# Altium PCB Ad_Fpga.PcbDoc (part 5 of 8)
Units mil, origin at the board's own origin, x right, y up, seen from the top; angles counter-clockwise.
Board outline 5995 x 3921.26 mil, 6 copper layers (Top Layer, GND, Mid-Layer 1, Mid-Layer 2, VCC, Bottom Layer); 476 components, 538 nets, 2139 pads, 1047 vias.
Unrouted connection lines stored in the file: 2.
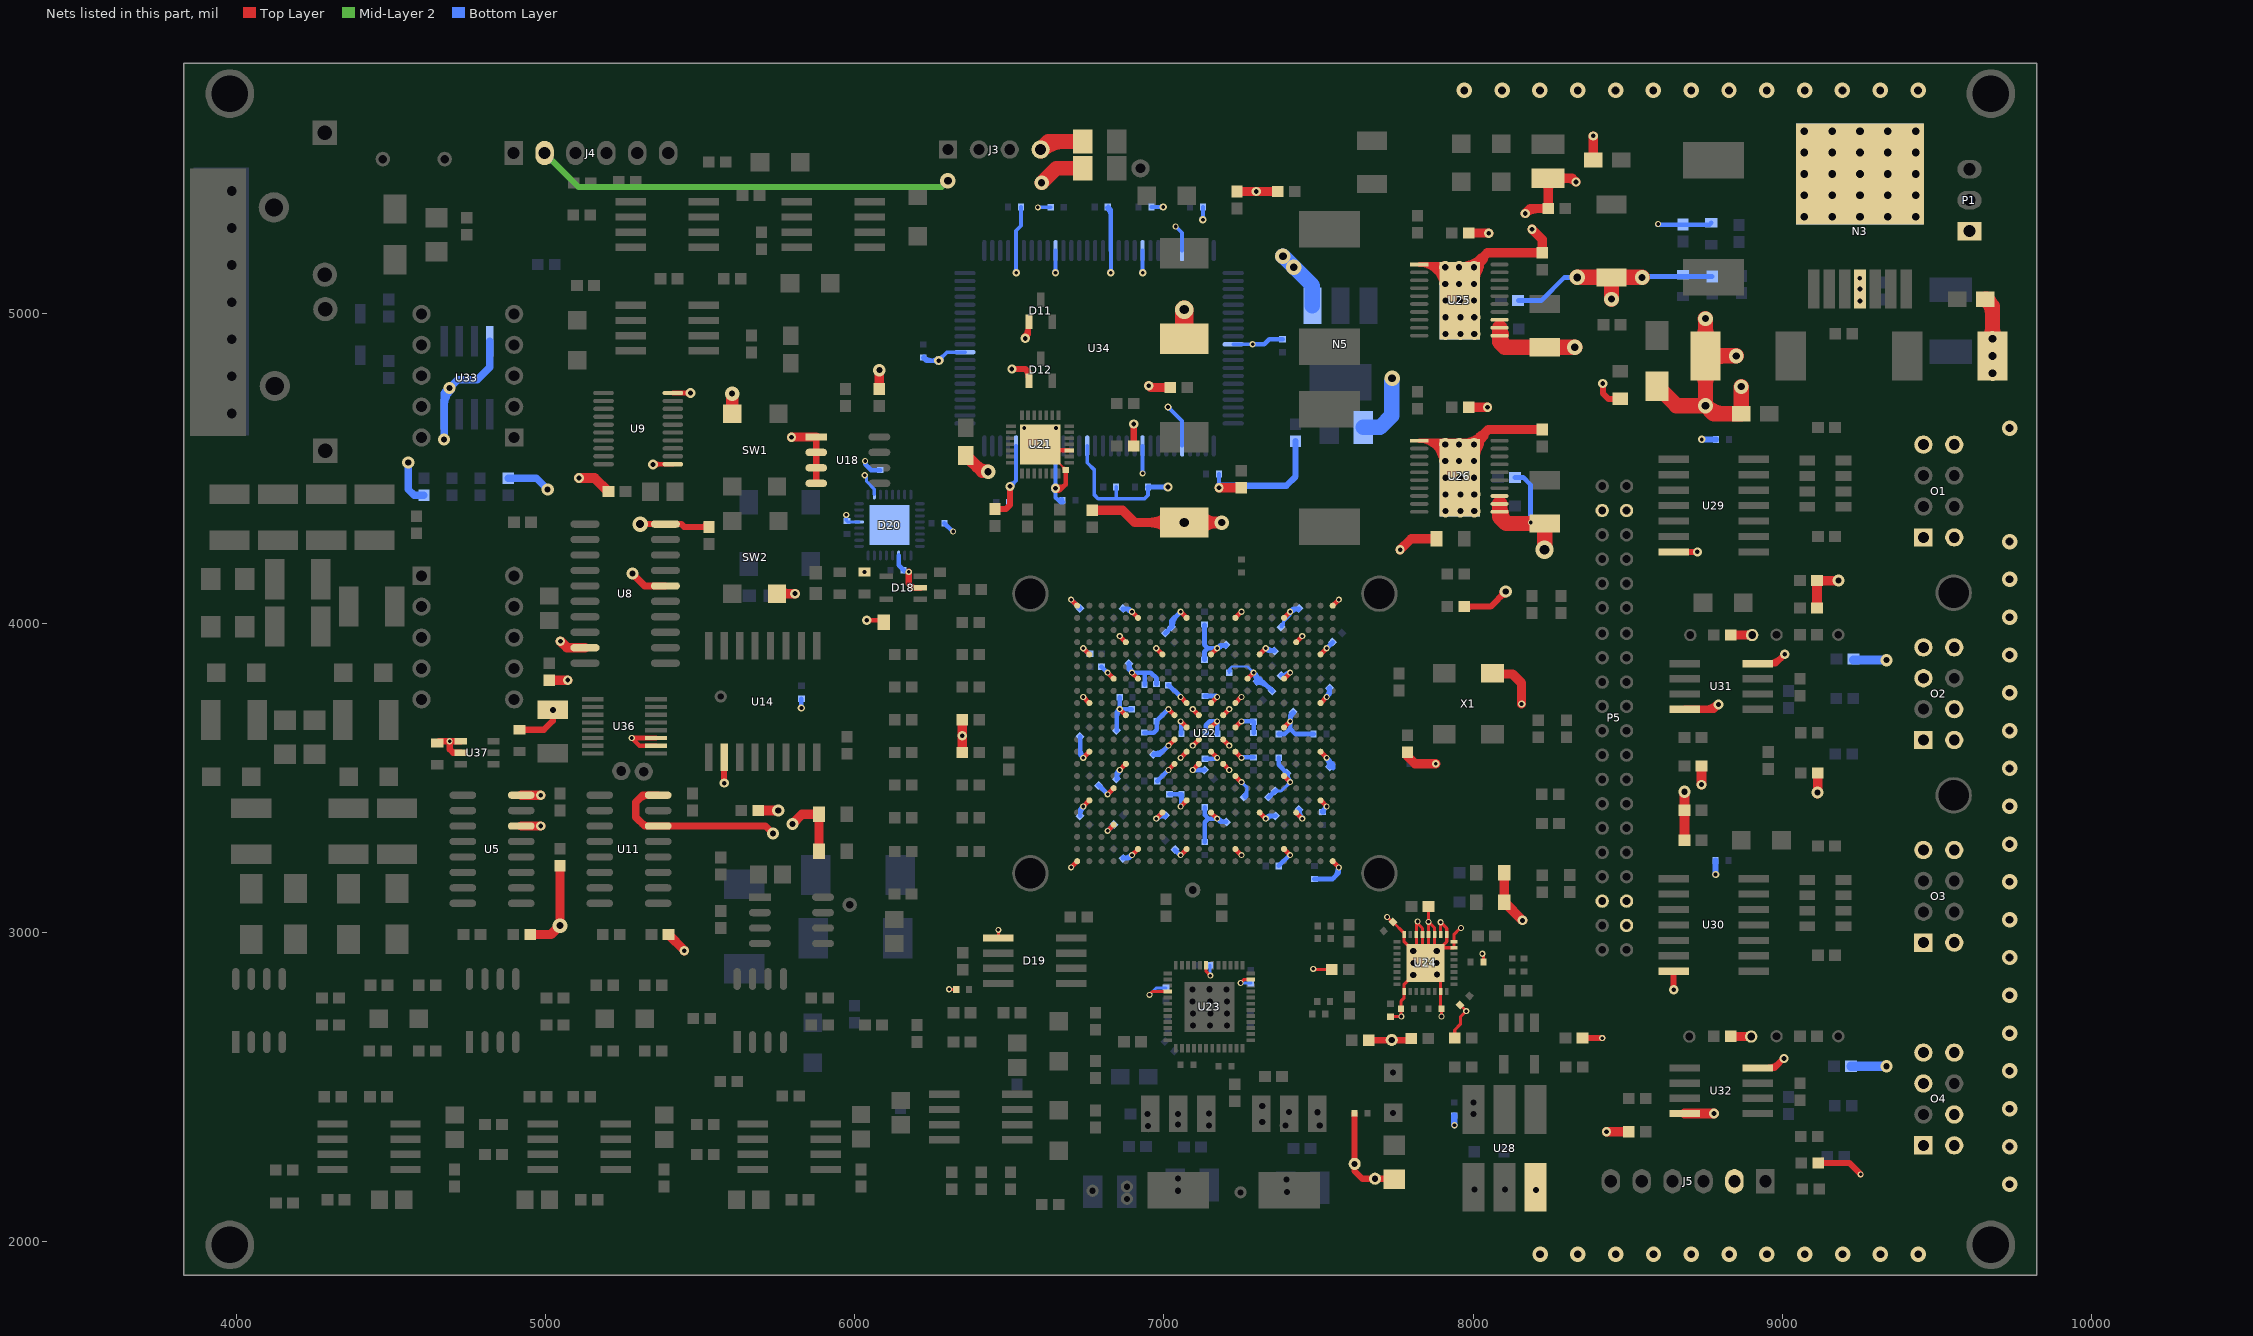
[diagram p9: the nets of this part, all layers, seen from the top]

## Via types
v1: diameter 19.68, hole 11.81, Top Layer to Bottom Layer, 523 vias
v2: diameter 50, hole 25, Top Layer to Bottom Layer, 162 vias
v3: diameter 30, hole 15, Top Layer to Bottom Layer, 100 vias
v4: diameter 39.37, hole 19.68, Top Layer to Bottom Layer, 75 vias
v5: diameter 31.5, hole 15.75, Top Layer to Bottom Layer, 44 vias
v6: diameter 40, hole 20, Top Layer to Bottom Layer, 38 vias
v7: diameter 24, hole 12, Top Layer to Bottom Layer, 33 vias
v8: diameter 47.24, hole 23.62, Top Layer to Bottom Layer, 24 vias
v9: diameter 59.06, hole 31.5, Top Layer to Bottom Layer, 10 vias
v10: diameter 60, hole 30, Top Layer to Bottom Layer, 9 vias
v11: diameter 25.98, hole 12.99, Top Layer to Bottom Layer, tented top, 9 vias
v12: diameter 23.62, hole 11.81, Top Layer to Bottom Layer, 8 vias
v13: diameter 50, hole 27.56, Top Layer to Bottom Layer, 4 vias
v14: diameter 51.18, hole 27.56, Top Layer to Bottom Layer, 2 vias
v15: diameter 39.37, hole 23.62, Top Layer to Bottom Layer, 2 vias
v16: diameter 80, hole 40, Top Layer to Bottom Layer, 1 vias
v17: diameter 47.24, hole 19.68, Top Layer to Bottom Layer, 1 vias
v18: diameter 47.24, hole 27.56, Top Layer to Bottom Layer, 1 vias
v19: diameter 22.05, hole 11.81, Top Layer to Bottom Layer, 1 vias

## Nets (pads, with @x,y where several pads share a name; then routed paths per layer and width w, separated by ;. In a path a pad name is that pad's centre, name@x,y a point inside that pad or via, vN(x,y) a via of type N, cw(c..) or ccw(c..) an arc to the next point about the centre after c; other vN are vias at no path point) (continued)
GND: C18.1 C20.2 C22.2 C23.2 C28.1 C35.2 C41.1 C43.2 C46.2 C49.2 C54.2 C56.2 C57.2 C58.2 C59.1 C65.1 C69.2 C74.2 C75.2 C77.2 C78.2 C79.2 C80.2 C81.2 C82.2 C83.2 C84.2 C85.2 C86.2 C87.2 C88.2 C89.2 C90.1 C91.2 C92.2 C93.2 C96.2 C97.1 C99.2 C104.2 C105.2 C106.2 C110.1 C113.1 C114.1 C115.1 C117.1 C118.1 C119.1 C120.1 C121.1 C122.1 C123.1 C124.1 C125.1 C126.1 C127.1 C128.1 C129.1 C130.1 C131.1 C132.1 C133.1 C134.1 C135.1 C136.1 C138.1 C139.1 C140.1 C141.1 C142.1 C143.1 C144.1 C145.1 C146.1 C147.1 C148.1 C152.1 C153.1 C154.1 C155.1 C156.1 C158.2 C159.1 C160.1 C161.1 C162.1 C163.2 C164.1 C165.1 C166.1 C167.1 C168.1 C169.1 C170.1 C171.1 C172.1 C173.1 C174.1 C175.1 C176.1 C177.1 C178.1 C179.1 C180.1 C181.1 C182.1 C183.1 C184.1 C185.1 C186.1 C187.1 C188.1 C189.1 C190.1 C191.1 C192.1 C193.1 C194.1 C195.1 C196.1 C197.1 C198.1 C199.1 C200.1 C201.1 C204.1 C205.1 C206.1 C207.1 C208.1 C209.1 C210.1 C211.1 C215.2 C216.1 C218.1 C219.1 C220.2 C221.2 C222.2 C223.1 C224.1 C225.1 C226.1 C227.1 C228.2 C229.2 D6.1 D8.2 D9.2 D10.2 D11.1 D12.1 D13.2 D14.2 D15.2 D16.2 D18.2 D19.1 D20.11 D20.21 D20.26 D20.33 J3.4 J4.2 J5.2 N3.4 N3.8 N5.1 O1.1 O1.4 O1.5 O1.8 O2.1 O2.3 O2.4 O2.5 O2.7 O2.8 O3.1 O3.4 O3.5 O3.8 O4.1 O4.3 O4.4 O4.5 O4.7 O4.8 P1.1 P5.4 P5.5 P5.6 P5.37 P5.38 pad.0@5023,3719 pad.0@7617,2250 pad.0@7683,2202 pad.0@7737,2651 pad.0@7806.5,2860.5 pad.0@7806.64,2939.36 pad.0@7807,2900 pad.0@7882,2900 pad.0@7882.64,2939 pad.0@7883.25,2862.75 pad.0@7957,4470 pad.0@7957,5043 pad.0@8204,2166 pad.0@8903,3961 pad.0@9251.02,5452.84 pad.2 R61.1 R65.2 R69.1 R77.2 R78.1 R80.2 R87.1 R89.2 R90.2 R93.2 R95.1 R101.1 R104.1 R119.2 R126.2 R129.2 R141.1 R142.1 R153.1 R154.1 SW1.2 SW2.1 U5.6 U5.8 U8.6 U8.10 U8.19 U9.1 U9.10 U11.6 U11.8 U14.10 U18.1 U18.2 U18.3 U18.4 U21.0 U21.3 U22.A1 U22.A22 U22.AA5 U22.AA9 U22.AA13 U22.AA17 U22.AB1 U22.AB22 U22.B5 U22.B9 U22.B13 U22.B17 U22.D4 U22.D18 U22.E2 U22.E7 U22.E11 U22.E15 U22.E21 U22.G5 U22.G18 U22.H7 U22.J2 U22.J9 U22.J11 U22.J13 U22.J15 U22.J21 U22.K10 U22.K12 U22.K14 U22.L5 U22.L9 U22.L11 U22.L13 U22.L18 U22.M10 U22.M12 U22.M14 U22.N2 U22.N9 U22.N11 U22.N13 U22.N17 U22.N21 U22.P10 U22.P12 U22.P14 U22.R5 U22.R18 U22.U2 U22.U7 U22.U21 U22.V4 U22.V10 U22.V14 U22.W7 U22.W16 U22.W19 U23.7 U23.16 U23.47 U24.7 U24.8 U24.9 U24.10 U24.11 U24.12 U24.13 U24.14 U24.16 U24.25 U24.31 U24.33 U25.1 U25.11 U25.12 U25.13 U26.1 U26.11 U26.12 U26.13 U28.3 U29.7 U30.7 U31.4 U31.8 U32.4 U32.8 U33.4 U33.8 U34.5 U34.10 U34.17 U34.21 U34.26 U34.40 U34.55 U34.60 U34.67 U34.71 U34.76 U34.90 U36.10 U36.11 U37.1 U37.2 X1.2 | length 43663
  Top Layer w7: U21.0@6619.2,4558.37 U21.0@6682.19,4495.38 ; U21.0@6675.85,4495.38 ccw(c6660.53,4495.38) 6671.36,4506.21 ccw(c6682.19,4517.03) U21.0@6682.19,4501.72
  Top Layer w10: v1(6305,2815) 6306,2815 6307.02,2813.98 C216.1@6327.7,2813.98 ; v1(6464,3007) 6464.4,3006.6 D19.1@6464.4,2981.12 ; v1(6953,2797) 6953,2798 6962.5,2807.5 U23.16@7012.11,2807.5 ; U23.7@7136.61,2892.6 7136.61,2872.39 v1(7150,2859) ; v1(7248,2835) 7259.9,2846.9 U23.47@7280.71,2846.9 ; v1(7483,2881) 7483,2878 7484,2879 R89.2@7543,2879 ; v1(7722,3049) 7738.4,3032.6 C206.1@7740.85,3032.6 7777.24,2996.2 U24.16@7777.24,2991.84 7777.24,2968.76 U24.33@7846,2900 ; C200.1@7733.14,2726.22 7766.22,2726.22 v1@7767,2727 ; v1(7768,2727) v1@7767,2727 ; U24.33@7816.64,2929.36 U24.14@7816.64,2991.84 v1@7816.64,3031.64 ; v1(7821,3034) 7819,3034 v1@7816.64,3031.64 ; R87.1@7856,3083 v1(7856,3033) v1@7855.94,3032.94 ; U24.10@7895.34,2991.84 v1(7895.34,3031.66) 7915.04,3011.96 U24.9@7915.04,2991.84 7915.04,2969.04 U24.33@7895.34,2949.34 ; v1(7898,2727) 7897.7,2727.3 C208.1@7897.7,2752.02 7895.34,2754.37 U24.31@7895.34,2808.44 7895.34,2850.66 U24.33@7846,2900 ; R101.1@7941,2657 7941,2683.37 7959,2701.37 7959,2725.43 v1@7978,2744.43 ; C205.1@7958.22,2764.2 v1@7978,2744.43 ; v1(7961,3013) 7959,3013 7937.84,2991.84 U24.8@7937.84,2969.04 U24.7@7937.84,2949.34 U24.33@7895.34,2949.34 ; v1(7978,2744) v1@7978,2744.43 ; v1(8030,2930) 8033.7,2926.3 C198.1@8033.7,2903.02 ; v1@7767,2727 7767.3,2727.3 C199.1@7767.3,2751.98 7767.3,2777.3 7777.24,2787.24 U24.25@7777.24,2808.44 7777.24,2831.24 U24.33@7846,2900 ; v1@7816.64,3031.64 7836.34,3011.94 U24.13@7836.34,2991.84 7836.34,2909.66 U24.33@7846,2900 ; U24.33@7846,2900 7855.94,2909.94 U24.12@7855.94,2991.84 v1@7855.94,3032.94 ; U24.33@7846,2900 7875.64,2929.64 U24.11@7875.64,2991.84 7875.64,3013.24 v1@7855.94,3032.94 ; U24.33@7846,2900 U24.33@7895.34,2949.34
  Top Layer w11.81: v5@6544.04,4927.96 ccw(c6496.94,4975.13) D11.1@6563.6,4975.13 6563.6,4933.6 ; v5@6551,4920 v5(6551,4921) 6563.6,4933.6 ; v5@6552.39,4919.61 ccw(c6525.39,4946.64) 6563.6,4946.64 ; v5@6553.19,4930.6 ccw(c6555.68,4941.52) 6563.6,4933.6 ; 6555.05,4943.22 cw(c6578.9,4936.83) D11.1@6566.55,4958.21 ; D11.1@6559.42,4959.15 cw(c6549.34,4949.07) 6563.6,4949.07 cw(c6577.86,4949.07) D11.1@6567.77,4959.15 ; v5@6560.6,4923.19 cw(c6571.52,4925.68) 6563.6,4933.6
  Top Layer w15: U36.10@5356.72,3603 5303,3603 v1(5278,3628) U36.11@5356.72,3628 ; v3(6038,4009) 6086,4009 D10.2@6093,4002 ; U21.0@6599.51,4578.06 6619.2,4558.37 U21.3@6694,4558.37 ; v3(6649,4436) 6670,4436 6682.19,4448.19 ; U21.0@6682.19,4495.38 6682.19,4448.19 ; v1(6699.54,3209.54) U22.AB22@6719.23,3229.23 ; v1(6699.54,4075.69) U22.AB1@6719.23,4056 ; v1(6738.91,3406.39) U22.AA17@6758.6,3426.08 ; v1(6738.91,3563.87) U22.AA13@6758.6,3583.56 ; v1(6738.91,3760.73) U22.AA9@6758.6,3741.04 ; v1(6738.91,3918.21) U22.AA5@6758.6,3898.52 ; v1(6817.65,3327.65) U22.W19@6837.34,3347.34 ; v1(6817.65,3445.76) U22.W16@6837.34,3465.45 ; v1(6817.65,3839.47) U22.W7@6837.34,3819.78 ; v1(6857.02,3524.5) U22.V14@6876.71,3544.19 ; v1(6857.02,3721.36) U22.V10@6876.71,3701.67 ; v1(6857.02,3957.58) U22.V4@6876.71,3937.89 ; v1(6896.39,3248.91) U22.U21@6916.08,3268.6 ; v1(6896.39,3839.47) U22.U7@6916.08,3819.78 ; v1(6896.39,4036.32) U22.U2@6916.08,4016.63 ; v1(6975.13,3367.02) U22.R18@6994.82,3386.71 ; v1(6975.13,3918.21) U22.R5@6994.82,3898.52 ; v1(7014.5,3524.5) U22.P14@7034.19,3544.19 ; v1(7014.5,3603.24) U22.P12@7034.19,3622.93 ; v1(7014.5,3721.36) U22.P10@7034.19,3701.67 ; v1(7053.87,3248.91) U22.N21@7073.56,3268.6 ; v1(7053.87,3406.39) U22.N17@7073.56,3426.08 ; v1(7053.87,3563.87) U22.N13@7073.56,3583.56 ; v1(7053.87,3681.99) U22.N11@7073.56,3662.3 ; v1(7053.87,3760.73) U22.N9@7073.56,3741.04 ; v1(7053.87,4036.32) U22.N2@7073.56,4016.63 ; v1(7093.24,3524.5) U22.M14@7112.93,3544.19 ; v1(7093.24,3603.24) U22.M12@7112.93,3622.93 ; v1(7093.24,3721.36) U22.M10@7112.93,3701.67 ; U22.L18@7152.3,3386.71 v1(7171.99,3367.02) ; U22.L13@7152.3,3583.56 v1(7171.99,3563.87) ; U22.L11@7152.3,3662.3 v1(7171.99,3681.99) ; U22.L9@7152.3,3741.04 v1(7171.99,3760.73) ; U22.L5@7152.3,3898.52 v1(7171.99,3918.21) ; U22.K14@7191.67,3544.19 v1(7211.36,3524.5) ; U22.K12@7191.67,3622.93 v1(7211.36,3603.24) ; U22.K10@7191.67,3701.67 v1(7211.36,3721.36) ; U22.J21@7231.04,3268.6 v1(7250.73,3248.91) ; U22.J15@7231.04,3504.82 v1(7250.73,3485.13) ; U22.J13@7231.04,3583.56 v1(7250.73,3563.87) ; U22.J11@7231.04,3662.3 v1(7250.73,3681.99) ; U22.J9@7231.04,3741.04 v1(7250.73,3760.73) ; U22.J2@7231.04,4016.63 v1(7250.73,4036.32) ; U22.H7@7270.41,3819.78 v1(7290.1,3839.47) ; U22.G18@7309.78,3386.71 v1(7329.47,3367.02) ; U22.G5@7309.78,3898.52 v1(7329.47,3918.21) ; U22.E21@7388.52,3268.6 v1(7408.21,3248.91) ; U22.E15@7388.52,3504.82 v1(7408.21,3485.13) ; U22.E11@7388.52,3662.3 v1(7408.21,3681.99) ; U22.E7@7388.52,3819.78 v1(7408.21,3839.47) ; U22.E2@7388.52,4016.63 v1(7408.21,4036.32) ; U22.D18@7427.89,3386.71 v1(7447.58,3367.02) ; U22.D4@7427.89,3937.89 v1(7447.58,3957.58) ; U22.B17@7506.63,3426.08 v1(7526.32,3406.39) ; U22.B13@7506.63,3583.56 v1(7526.32,3563.87) ; U22.B9@7506.63,3741.04 v1(7526.32,3760.73) ; U22.B5@7506.63,3898.52 v1(7526.32,3918.21) ; U22.A1@7546,4056 v1(7565.69,4075.69) ; U22.A22@7547.77,3229.23 U22.A22@7546,3229.23 7566,3209.23 v1(7566,3209) ; 7858.09,5160 cw(c7858.09,5099.09) pad.0@7901.16,5142.16 ; 7861.65,5153.34 ccw(c7876.69,5185.27) pad.0@7901.29,5159.96 ; 7865.45,4590.16 ccw(c7885.13,4608.88) pad.0@7902.16,4587.73 ; 7869.83,5156.58 ccw(c7881.92,5190.15) pad.0@7902.71,5161.16 ; 7875.3,4584.09 ccw(c7886.34,4603.2) pad.0@7901.44,4587.11 ; 7876.68,4578.36 ccw(c7895.38,4596.15) pad.0@7911.57,4576.05 ; 7879.92,4585.9 cw(c7872.3,4555.35) pad.0@7899.28,4571.56 ; 7880.77,5159.1 cw(c7872.72,5129.8) pad.0@7899.13,5144.82 ; 7881.06,5159.02 ccw(c7889,5187.91) pad.0@7903.82,5161.87 ; 7881.24,5144.11 ccw(c7892.81,5168.68) pad.0@7911.74,5149.21 ; 7881.71,4585.45 ccw(c7888.7,4613.47) pad.0@7903.56,4588.72 ; 7886.34,4559.24 cw(c7851.48,4528.88) pad.0@7897.54,4525.04 ; 7887.91,4566.56 ccw(c7905.63,4583.42) pad.0@7920.98,4564.37 ; 7889.32,4571.07 ccw(c7946.72,4585.6) pad.0@7916.4,4534.74 ; 7890.61,4565.97 ccw(c7959.36,4583.36) pad.0@7956.23,4512.52 ; 7890.8,4546.44 ccw(c7910.05,4560.12) pad.0@7910.02,4536.5 ; v6@7891.92,5147.5 cw(c7869.19,5108.13) pad.0@7914.57,5105.48 ; pad.0@7894.07,4541.84 cw(c7876.86,4529.6) pad.0@7897.67,4526.08 ; pad.0@7896.55,4572.74 ccw(c7954.28,4578.94) pad.0@7917.84,4533.73 ; pad.0@7896.82,5144.67 ccw(c7921.14,5186.79) pad.0@7940.28,5142.07 ; pad.0@7899.6,5106.35 ccw(c7842.03,5109.72) 7870.86,5159.65 ccw(c7906.41,5221.22) pad.0@7934.38,5155.86 ; pad.0@7899.72,5104.11 ccw(c7879.44,5118.15) pad.0@7902.19,5127.66 ; pad.0@7900.59,5114.15 ccw(c7854.66,5123.23) 7887.98,5156.12 ccw(c7909.95,5177.81) pad.0@7926.39,5151.67 ; pad.0@7900.64,4541.41 ccw(c7856.6,4550.32) 7887.82,4582.64 ccw(c7909.63,4605.22) pad.0@7926.36,4578.65 ; pad.0@7901.04,5126.38 cw(c7920.02,5135.42) pad.0@7908.65,5153.1 ; pad.0@7901.1,5142.83 ccw(c7920.14,5161.62) pad.0@7934.37,5138.98 ; pad.0@7901.57,4569.35 ccw(c7920.12,4588.55) pad.0@7934.35,4565.96 ; pad.0@7902.98,4534.34 ccw(c7895.31,4545.62) 7908.85,4547.23 ccw(c7926.37,4549.31) pad.0@7916.79,4534.5 ; pad.0@7903.09,5160 cw(c7903.09,5099.09) pad.0@7946.16,5142.16 ; pad.0@7905.29,4535.58 ccw(c7901.92,4543.86) pad.0@7910.59,4546.05 ; pad.0@7907.5,5138.75 cw(c7900.47,5104.25) pad.0@7929.84,5123.67 ; pad.0@7908.1,4565.65 cw(c7898.59,4503.95) pad.0@7948.95,4540.83 ; pad.0@7908.16,5154.11 ccw(c7922.58,5187.17) pad.0@7946.66,5160.31 ; pad.0@7908.36,5111 cw(c7929.3,5120.98) pad.0@7916.76,5140.49 ; pad.0@7908.41,5138.6 cw(c7901.22,5082.57) pad.0@7945.93,5117.1 ; pad.0@7909.12,4566.32 ccw(c7903.6,4619.77) pad.0@7945.3,4585.88 ; pad.0@7909.27,4543.69 cw(c7927.58,4551) pad.0@7916.82,4567.53 ; pad.0@7911.84,4579.69 cw(c7885.9,4555.92) pad.0@7921.05,4554.38 ; pad.0@7913.41,4561.15 ccw(c7900.81,4609.95) pad.0@7944.23,4584.35 ; pad.0@7916.19,4570.34 ccw(c7911.95,4613.32) pad.0@7945.34,4585.93 ; pad.0@7916.49,5140.32 cw(c7921.81,5131.57) pad.0@7929.92,5137.83 ; pad.0@7917.2,4513.78 cw(c7932.38,4492.21) pad.0@7936.9,4518.2 ; pad.0@7917.28,4588.16 ccw(c7932.21,4609.02) 7937.29,4583.88 ccw(c7942.11,4560.11) pad.0@7920.92,4571.91 ; pad.0@7918.56,4587.11 ccw(c7933.66,4603.2) pad.0@7944.7,4584.09 ; pad.0@7918.79,5157.5 ccw(c7929.65,5187.8) pad.0@7947.91,5161.29 ; pad.0@7918.84,5142.16 cw(c7961.91,5099.09) pad.0@7961.91,5160 ; pad.0@7920.22,4531.2 ccw(c7948,4550.75) pad.0@7942.19,4517.28 ; pad.0@7920.3,4584.09 ccw(c7931.34,4603.2) pad.0@7946.44,4587.11 ; pad.0@7922.02,5147.56 ccw(c7976.73,5131.92) pad.0@7926.98,5104.3 ; pad.0@7922.16,4562.36 cw(c7887.83,4519.64) pad.0@7942.53,4523.19 ; pad.0@7922.25,5148.5 ccw(c7946.89,5143.48) pad.0@7925.91,5129.61 ; pad.0@7925.72,4564.32 ccw(c7919.69,4587.66) pad.0@7942.94,4581.3 ; pad.0@7928.69,5139.42 ccw(c7981.46,5161.48) pad.0@7959.75,5108.56 ; pad.0@7929.56,5144.77 ccw(c7939.72,5168.05) pad.0@7956.67,5149.14 ; pad.0@7930.42,4583.09 cw(c7931.63,4571.36) pad.0@7942.98,4574.58 ; pad.0@7931.33,4564.9 ccw(c7922.69,4558.57) pad.0@7916.84,4567.53 ; pad.0@7934.49,4572.15 cw(c7936.18,4555.06) pad.0@7947.07,4568.34 ; pad.0@7934.72,4555.79 cw(c7918.58,4535.71) pad.0@7943.1,4527.83 ; pad.0@7935.37,4510.85 ccw(c7932.19,4542.67) pad.0@7956.93,4522.42 ; pad.0@7945.39,5104.99 ccw(c7927.67,5119.71) pad.0@7948.92,5128.59 ; pad.0@7946.72,5130.34 cw(c7962.74,5137.9) pad.0@7953.73,5153.15 ; pad.0@7951.09,5160 cw(c7951.09,5099.09) pad.0@7994.16,5142.16 ; pad.0@7953.75,5115.46 cw(c7971.14,5123.68) pad.0@7961.36,5140.24 ; pad.0@7956.84,4579.69 cw(c7930.91,4555.91) pad.0@7966.06,4554.39 ; pad.0@7963.69,4586.98 ccw(c7978.13,4601.91) pad.0@7988.76,4584.07 ; pad.0@7963.84,5142.16 cw(c8006.91,5099.09) pad.0@8006.91,5160 ; pad.0@7967.02,5147.58 ccw(c8013.56,5134.35) pad.0@7971.3,5110.8 ; pad.0@7968.3,4584.09 ccw(c7979.34,4603.2) pad.0@7994.44,4587.11 ; pad.0@7980.95,4557.2 cw(c7962.7,4534.49) pad.0@7990.9,4527.15 ; pad.0@8008,5160 U25.1@7826,5160 ; 6667.11,4436 cw(c6667.11,4454.11) 6654.3,4441.3 ccw(c6667.11,4454.11) 6667.11,4436 ; 6667.11,4436 ccw(c6667.11,4417.89) 6654.3,4430.7 cw(c6667.11,4417.89) 6667.11,4436 ; 6682.19,4448.19 cw(c6663.3,4467.07) 6652.14,4442.81 ccw(c6663.3,4467.07) 6682.19,4448.19 ; U26.1@7826,4590 cw(c7826,4515.73) pad.0@7899.84,4523.77 ; U26.1@7826,4590 cw(c7826,4515.73) pad.0@7899.84,4523.77 ; U26.1@7826,4590 cw(c7826,4515.73) pad.0@7899.84,4523.77 ; U26.1@7826,4590 pad.0@8013,4590 ; U25.1@7826,5160 cw(c7826,5085.32) 7900.02,5095.31 ccw(c7826,5085.32) U25.1@7826,5160 ; U26.1@7842.73,4590 cw(c7842.73,4517.55) pad.0@7914.75,4525.4 ; U26.1@7842.73,4590 cw(c7842.73,4517.55) pad.0@7914.75,4525.4 ; U26.1@7842.73,4590 cw(c7842.73,4517.55) pad.0@7914.75,4525.4 ; 7859.47,4584.09 ccw(c7877.79,4621.27) pad.0@7902.54,4588.03 ; 7859.47,4584.09 ccw(c7877.79,4621.27) pad.0@7902.54,4588.03 ; 7859.47,4584.09 ccw(c7877.79,4621.27) pad.0@7902.54,4588.03 ; 7859.45,4590 cw(c7859.45,4519.37) pad.0@7929.66,4527.02 ; 7859.45,4590 cw(c7859.45,4519.37) pad.0@7929.66,4527.02 ; 7859.45,4590 cw(c7859.45,4519.37) pad.0@7929.66,4527.02 ; 7866.27,4589.3 cw(c7833.03,4531.73) pad.0@7899.51,4530.8 ; 7866.27,4589.3 ccw(c7907.25,4660.28) pad.0@7936.49,4583.72 ; 7866.27,4589.3 ccw(c7907.25,4660.28) pad.0@7936.49,4583.72 ; 7866.27,4589.3 cw(c7833.03,4531.73) pad.0@7899.51,4530.8 ; 7866.27,4589.3 ccw(c7907.25,4660.28) pad.0@7936.49,4583.72 ; 7866.27,4589.3 cw(c7833.03,4531.73) pad.0@7899.51,4530.8 ; 7866.47,4587.36 ccw(c7883.33,4632.18) pad.0@7904.48,4589.22 ; 7866.47,4587.36 ccw(c7883.33,4632.18) pad.0@7904.48,4589.22 ; 7866.47,4587.36 ccw(c7883.33,4632.18) pad.0@7904.48,4589.22 ; 7876.12,4590.01 cw(c7865.74,4553.23) pad.0@7899.09,4571.9 ; 7876.12,4590.01 cw(c7865.74,4553.23) pad.0@7899.09,4571.9 ; 7876.12,4590.01 cw(c7865.74,4553.23) pad.0@7899.09,4571.9 ; 7876.17,4590 cw(c7876.17,4521.19) pad.0@7944.57,4528.65 ; 7876.17,4590 cw(c7876.17,4521.19) pad.0@7944.57,4528.65 ; 7876.17,4590 cw(c7876.17,4521.19) pad.0@7944.57,4528.65 ; 7881.48,4573.25 ccw(c7894.24,4599.16) pad.0@7911.49,4575.99 ; 7881.48,4573.25 ccw(c7894.24,4599.16) pad.0@7911.49,4575.99 ; 7881.48,4573.25 ccw(c7894.24,4599.16) pad.0@7911.49,4575.99 ; 7885.06,4586.3 cw(c7845.16,4547.45) pad.0@7900.19,4538.86 ; 7885.06,4586.31 ccw(c7910.94,4611.5) pad.0@7928.71,4580.06 ; 7885.06,4586.31 ccw(c7910.94,4611.5) pad.0@7928.71,4580.06 ; 7885.06,4586.3 cw(c7845.16,4547.45) pad.0@7900.19,4538.86 ; 7885.06,4586.31 ccw(c7910.94,4611.5) pad.0@7928.71,4580.06 ; 7885.06,4586.3 cw(c7845.16,4547.45) pad.0@7900.19,4538.86 ; 7885.06,4586.31 ccw(c7910.94,4611.5) pad.0@7928.71,4580.06 ; 7885.06,4586.3 cw(c7845.16,4547.45) pad.0@7900.19,4538.86 ; 7885.85,4559.8 ccw(c7938.08,4580.07) pad.0@7957.88,4527.66 ; 7885.85,4559.8 ccw(c7938.08,4580.07) pad.0@7957.88,4527.66 ; 7885.85,4559.8 ccw(c7938.08,4580.07) pad.0@7957.88,4527.66 ; 7887.07,4586.92 ccw(c7893.09,4608.22) pad.0@7903.9,4588.91 ; 7887.07,4586.92 ccw(c7893.09,4608.22) pad.0@7903.9,4588.91 ; 7887.07,4586.92 ccw(c7893.09,4608.22) pad.0@7903.9,4588.91 ; 7888.41,4576.52 cw(c7862.32,4531.32) pad.0@7914.5,4530.59 ; 7888.41,4576.52 cw(c7862.32,4531.32) pad.0@7914.5,4530.59 ; 7888.41,4576.52 cw(c7862.32,4531.32) pad.0@7914.5,4530.59 ; 7891.33,4545.68 ccw(c7943.43,4565.91) pad.0@7963.18,4513.63 ; 7891.33,4545.68 ccw(c7943.43,4565.91) pad.0@7963.18,4513.63 ; 7891.33,4545.68 ccw(c7943.43,4565.91) pad.0@7963.18,4513.63 ; pad.0@7892.9,4590 cw(c7892.9,4523.02) pad.0@7959.49,4530.27 ; pad.0@7892.9,4590 cw(c7892.9,4523.02) pad.0@7959.49,4530.27 ; pad.0@7892.9,4590 cw(c7892.9,4523.02) pad.0@7959.49,4530.27 ; pad.0@7893.57,4573.54 ccw(c7921.74,4622.33) pad.0@7941.84,4569.7 ; pad.0@7893.57,4573.54 ccw(c7921.74,4622.33) pad.0@7941.84,4569.7 ; pad.0@7893.57,4573.54 ccw(c7921.74,4622.33) pad.0@7941.84,4569.7 ; pad.0@7898.64,4572.36 ccw(c7920.84,4593.98) pad.0@7936.09,4567 ; pad.0@7898.64,4572.36 ccw(c7920.84,4593.98) pad.0@7936.09,4567 ; pad.0@7898.64,4572.36 ccw(c7920.84,4593.98) pad.0@7936.09,4567 ; pad.0@7898.64,4572.36 ccw(c7920.84,4593.98) pad.0@7936.09,4567 ; pad.0@7899.94,4531.42 ccw(c7879.81,4546.27) pad.0@7903.13,4555.33 ; pad.0@7899.94,4531.42 ccw(c7879.81,4546.27) pad.0@7903.13,4555.33 ; pad.0@7899.94,4531.42 ccw(c7879.81,4546.27) pad.0@7903.13,4555.33 ; pad.0@7901.37,4555.57 cw(c7919.41,4563.57) pad.0@7908.63,4580.09 ; pad.0@7901.37,4555.57 cw(c7919.41,4563.57) pad.0@7908.63,4580.09 ; pad.0@7901.37,4555.57 cw(c7919.41,4563.57) pad.0@7908.63,4580.09 ; pad.0@7901.79,4533.42 ccw(c7891.13,4545.65) pad.0@7907.15,4548.16 ; pad.0@7901.79,4533.42 ccw(c7891.13,4545.65) pad.0@7907.15,4548.16 ; pad.0@7901.79,4533.42 ccw(c7891.13,4545.65) pad.0@7907.15,4548.16 ; pad.0@7901.79,4533.42 ccw(c7891.13,4545.65) pad.0@7907.15,4548.16 ; pad.0@7904.64,4584.68 ccw(c7923.03,4625.29) pad.0@7948,4588.36 ; pad.0@7904.64,4584.68 ccw(c7923.03,4625.29) pad.0@7948,4588.36 ; pad.0@7904.64,4584.68 ccw(c7923.03,4625.29) pad.0@7948,4588.36 ; pad.0@7907.15,4548.16 ccw(c7925.74,4551.07) pad.0@7916.28,4534.81 ; pad.0@7907.15,4548.16 ccw(c7925.74,4551.07) pad.0@7916.28,4534.81 ; pad.0@7907.15,4548.16 ccw(c7925.74,4551.07) pad.0@7916.28,4534.81 ; pad.0@7907.15,4548.16 ccw(c7925.74,4551.07) pad.0@7916.28,4534.81 ; pad.0@7907.26,4565.8 cw(c7898.55,4527.01) pad.0@7932.14,4548.28 ; pad.0@7907.26,4565.8 cw(c7898.55,4527.01) pad.0@7932.14,4548.28 ; pad.0@7907.26,4565.8 cw(c7898.55,4527.01) pad.0@7932.14,4548.28 ; pad.0@7908.51,4539.46 cw(c7929.16,4548.61) pad.0@7916.83,4567.53 ; pad.0@7908.51,4539.46 cw(c7929.16,4548.61) pad.0@7916.83,4567.53 ; pad.0@7908.51,4539.46 cw(c7929.16,4548.61) pad.0@7916.83,4567.53 ; pad.0@7909.62,4590 cw(c7909.62,4524.84) pad.0@7974.4,4531.9 ; pad.0@7909.62,4590 cw(c7909.62,4524.84) pad.0@7974.4,4531.9 ; pad.0@7909.62,4590 cw(c7909.62,4524.84) pad.0@7974.4,4531.9 ; pad.0@7914.67,4588.1 ccw(c7930.72,4630.83) pad.0@7949.78,4589.36 ; pad.0@7914.67,4588.1 ccw(c7930.72,4630.83) pad.0@7949.78,4589.36 ; pad.0@7914.67,4588.1 ccw(c7930.72,4630.83) pad.0@7949.78,4589.36 ; pad.0@7917.28,4567.84 cw(c7932.43,4546.71) pad.0@7936.66,4572.36 ; pad.0@7917.28,4567.84 cw(c7932.43,4546.71) pad.0@7936.66,4572.36 ; pad.0@7917.28,4567.84 cw(c7932.43,4546.71) pad.0@7936.66,4572.36 ; pad.0@7917.28,4567.84 cw(c7932.43,4546.71) pad.0@7936.66,4572.36 ; pad.0@7920.16,4585.28 ccw(c7948.08,4605.3) pad.0@7942.49,4571.4 ; pad.0@7920.16,4585.28 ccw(c7948.08,4605.3) pad.0@7942.49,4571.4 ; pad.0@7920.16,4585.28 ccw(c7948.08,4605.3) pad.0@7942.49,4571.4 ; pad.0@7920.16,4585.28 ccw(c7948.08,4605.3) pad.0@7942.49,4571.4 ; pad.0@7921.92,4574.24 ccw(c7970.53,4558.9) pad.0@7925.31,4535.38 ; pad.0@7921.92,4574.24 ccw(c7970.53,4558.9) pad.0@7925.31,4535.38 ; pad.0@7921.92,4574.24 ccw(c7970.53,4558.9) pad.0@7925.31,4535.38 ; pad.0@7922.2,4575.26 ccw(c7942.29,4570.75) pad.0@7924.89,4559.73 ; pad.0@7922.2,4575.26 ccw(c7942.29,4570.75) pad.0@7924.89,4559.73 ; pad.0@7922.2,4575.26 ccw(c7942.29,4570.75) pad.0@7924.89,4559.73 ; pad.0@7922.21,4575.31 cw(c7935.51,4572.37) pad.0@7936.84,4585.93 ; pad.0@7922.21,4575.31 cw(c7935.51,4572.37) pad.0@7936.84,4585.93 ; pad.0@7922.21,4575.31 cw(c7935.51,4572.37) pad.0@7936.84,4585.93 ; pad.0@7922.21,4575.31 cw(c7935.51,4572.37) pad.0@7936.84,4585.93 ; pad.0@7926.34,4590 cw(c7926.34,4526.66) pad.0@7989.31,4533.52 ; pad.0@7926.34,4590 cw(c7926.34,4526.66) pad.0@7989.31,4533.52 ; pad.0@7926.34,4590 cw(c7926.34,4526.66) pad.0@7989.31,4533.52 ; pad.0@7929.08,4573.61 ccw(c7940.67,4599.2) pad.0@7956.4,4575.93 ; pad.0@7929.08,4573.61 ccw(c7940.67,4599.2) pad.0@7956.4,4575.93 ; pad.0@7929.08,4573.61 ccw(c7940.67,4599.2) pad.0@7956.4,4575.93 ; pad.0@7929.56,4567.31 ccw(c7983.28,4588.17) pad.0@7960.04,4535.44 ; pad.0@7929.56,4567.31 ccw(c7983.28,4588.17) pad.0@7960.04,4535.44 ; pad.0@7929.56,4567.31 ccw(c7983.28,4588.17) pad.0@7960.04,4535.44 ; pad.0@7945.47,4532.09 ccw(c7927.38,4547.43) pad.0@7949.49,4556.02 ; pad.0@7945.47,4532.09 ccw(c7927.38,4547.43) pad.0@7949.49,4556.02 ; pad.0@7945.47,4532.09 ccw(c7927.38,4547.43) pad.0@7949.49,4556.02 ; pad.0@7946.99,4558.69 cw(c7962.63,4565.57) pad.0@7953.69,4580.13 ; pad.0@7946.99,4558.69 cw(c7962.63,4565.57) pad.0@7953.69,4580.13 ; pad.0@7946.99,4558.69 cw(c7962.63,4565.57) pad.0@7953.69,4580.13 ; pad.0@7947.73,4534.17 ccw(c7939.86,4545.19) pad.0@7953.25,4547.25 ; pad.0@7947.73,4534.17 ccw(c7939.86,4545.19) pad.0@7953.25,4547.25 ; pad.0@7947.73,4534.17 ccw(c7939.86,4545.19) pad.0@7953.25,4547.25 ; pad.0@7947.73,4534.17 ccw(c7939.86,4545.19) pad.0@7953.25,4547.25 ; pad.0@7951.25,4566.08 cw(c7946.39,4550.66) pad.0@7960.72,4558.13 ; pad.0@7951.25,4566.08 cw(c7946.39,4550.66) pad.0@7960.72,4558.13 ; pad.0@7951.25,4566.08 cw(c7946.39,4550.66) pad.0@7960.72,4558.13 ; pad.0@7952.53,4565.75 cw(c7943.88,4522.89) pad.0@7980.3,4547.08 ; pad.0@7952.53,4565.75 cw(c7943.88,4522.89) pad.0@7980.3,4547.08 ; pad.0@7952.53,4565.75 cw(c7943.88,4522.89) pad.0@7980.3,4547.08 ; pad.0@7953.25,4547.25 ccw(c7971.13,4550) pad.0@7961.59,4534.62 ; pad.0@7953.25,4547.25 ccw(c7971.13,4550) pad.0@7961.59,4534.62 ; pad.0@7953.25,4547.25 ccw(c7971.13,4550) pad.0@7961.59,4534.62 ; pad.0@7953.25,4547.25 ccw(c7971.13,4550) pad.0@7961.59,4534.62 ; pad.0@7953.91,4542.95 cw(c7971.7,4550.78) pad.0@7961.54,4567.34 ; pad.0@7953.91,4542.95 cw(c7971.7,4550.78) pad.0@7961.54,4567.34 ; pad.0@7953.91,4542.95 cw(c7971.7,4550.78) pad.0@7961.54,4567.34 ; pad.0@7966.92,4574.25 ccw(c8009.08,4560.98) pad.0@7969.89,4540.55 ; pad.0@7966.92,4574.25 ccw(c8009.08,4560.98) pad.0@7969.89,4540.55 ; pad.0@7966.92,4574.25 ccw(c8009.08,4560.98) pad.0@7969.89,4540.55 ; pad.0@7967.25,4575.53 ccw(c7983.56,4572.24) pad.0@7969.7,4563.03 ; pad.0@7967.25,4575.53 ccw(c7983.56,4572.24) pad.0@7969.7,4563.03 ; pad.0@7967.25,4575.53 ccw(c7983.56,4572.24) pad.0@7969.7,4563.03 ; pad.0@7975.25,4569.73 ccw(c8033.04,4592.16) pad.0@8008.04,4535.44 ; pad.0@7975.25,4569.73 ccw(c8033.04,4592.16) pad.0@8008.04,4535.44 ; pad.0@7975.25,4569.73 ccw(c8033.04,4592.16) pad.0@8008.04,4535.44 ; pad.0@8013,4590 ccw(c8013,4521.6) 7963.96,4569.29 cw(c8013,4521.6) pad.0@8013,4590 ; v3@6645.86,4429.19 ccw(c6653.7,4446.22) 6666.96,4432.96 cw(c6653.7,4446.22) v3@6645.86,4429.19 ; U25.1@7843.17,5160 cw(c7843.17,5087.63) 7914.88,5097.31 ccw(c7843.17,5087.63) U25.1@7843.17,5160 ; U26.1@7850.85,4590 cw(c7850.85,4518.85) 7901.16,4569.16 ccw(c7850.85,4518.85) U26.1@7850.85,4590 ; 7860.33,5160 cw(c7860.33,5089.95) 7929.75,5099.32 ccw(c7860.33,5089.95) 7860.33,5160 ; 7877.49,5160 cw(c7877.49,5092.27) 7944.61,5101.33 ccw(c7877.49,5092.27) 7877.49,5160 ; 7887.06,4590 cw(c7887.06,4555.06) 7911.77,4579.77 ccw(c7887.06,4555.06) 7887.06,4590 ; pad.0@7894.65,5160 cw(c7894.65,5094.58) 7959.48,5103.33 ccw(c7894.65,5094.58) pad.0@7894.65,5160 ; pad.0@7895.85,4590 cw(c7895.85,4518.85) 7946.16,4569.16 ccw(c7895.85,4518.85) pad.0@7895.85,4590 ; pad.0@7908.23,4579.77 cw(c7932.94,4555.06) 7932.94,4590 ccw(c7932.94,4555.06) pad.0@7908.23,4579.77 ; pad.0@7911.81,5160 cw(c7911.81,5096.9) 7974.34,5105.34 ccw(c7911.81,5096.9) pad.0@7911.81,5160 ; pad.0@7918.84,4569.16 cw(c7969.15,4518.85) 7969.15,4590 ccw(c7969.15,4518.85) pad.0@7918.84,4569.16 ; pad.0@7932.06,4590 cw(c7932.06,4555.06) 7956.77,4579.77 ccw(c7932.06,4555.06) pad.0@7932.06,4590 ; pad.0@7943.85,4590 cw(c7943.85,4518.85) 7994.16,4569.16 ccw(c7943.85,4518.85) pad.0@7943.85,4590 ; pad.0@7953.21,4579.74 cw(c7977.49,4556.13) 7977.49,4590 ccw(c7977.49,4556.13) pad.0@7953.21,4579.74 ; pad.0@7980.06,4590 cw(c7980.06,4555.06) 8004.77,4579.77 ccw(c7980.06,4555.06) pad.0@7980.06,4590
  Top Layer w15.75: v5(5347,4513) 5347.84,4513.84 U9.1@5411.2,4513.84 ; U9.10@5411.2,4744.16 5467.84,4744.16 v5(5468,4744) ; v5@5352.57,4507.43 cw(c5368.04,4491.96) 5368.04,4513.84 ccw(c5368.04,4491.96) v5@5352.57,4507.43 ; v5@5352.57,4518.57 ccw(c5363.98,4529.98) 5363.98,4513.84 cw(c5363.98,4529.98) v5@5352.57,4518.57 ; 5448.61,4744.16 cw(c5448.61,4724.61) 5462.43,4738.43 ccw(c5448.61,4724.61) 5448.61,4744.16 ; 5449.37,4744.16 ccw(c5449.37,4762.63) 5462.43,4749.57 cw(c5449.37,4762.63) 5449.37,4744.16
  Top Layer w19.68: C201.1@7616.3,2413.98 7616.3,2227.7 7642,2202 7742.88,2202 C69.2@7745,2199.88 ; R90.2@7663,2650 7794,2650 R93.2@7800,2656 ; v3(8420,4775) 8420,4743 8438,4725 D16.2@8477,4725
  Top Layer w20: C221.2@4649,3611.87 4654.54,3617.4 U37.1@4724.85,3617.4 ; v1(4689,3617.4) 4689,3591 4700,3580 U37.2@4724.85,3580 ; C222.2@4915,3654.87 4993.87,3654.87 5023,3684 C220.2@5023,3719 ; v2@5314,4311 v2(5305,4320) U8.10@5386.92,4320 5439,4320 5448,4311 C41.1@5528,4311 C41.1@5519,4320 ; v3(5577,3482) U14.10@5577,3565.76 ; U18.4@5875,4452 U18.3@5875,4502 U18.2@5875,4552 U18.1@5875,4602 ; v1@6174.24,4165.66 6174.24,4127.76 6188.25,4113.75 D18.2@6211.9,4113.75 ; R65.2@6453,4369 6489,4369 6502,4382 v3(6502,4442) ; R65.2@6458.66,4363.34 cw(c6472.31,4349.69) 6472.31,4369 cw(c6472.31,4388.31) R65.2@6458.66,4374.66 ; v3(6508,4822) 6551.6,4822 ; D12.1@6561.79,4795.47 ccw(c6526.88,4797.28) 6551.6,4822 ; D12.1@6563.6,4783.57 6563.6,4810 6551.6,4822 ; C49.2@6896.34,4578.66 ccw(c6882.69,4592.31) 6902,4592.31 ccw(c6921.31,4592.31) C49.2@6907.66,4578.66 ; C49.2@6902,4573 v3(6902,4644) ; R95.1@7972,4053 8057,4053 v6(8106,4102) ; R95.1@7978.66,4047.34 cw(c7992.31,4033.69) 7992.31,4053 cw(c7992.31,4072.31) R95.1@7978.66,4058.66 ; R104.1@8354,2657 v1(8418,2657) ; v3(8649,2813) U30.7@8649,2873 ; U29.7@8649,4230 v3(8726,4230) ; U32.4@8920.6,2560.52 8975.52,2560.52 v3(9006,2591) ; U31.4@8920.6,3868.52 8978.52,3868.52 v3(9009,3899) ; U32.4@8958,2562.33 ccw(c8958,2609) 8991,2576 ; U31.4@8958,3870.33 ccw(c8958,3924.24) 8996.12,3886.12 ; C93.2@9117,2253 9217,2253 v1(9254,2216) ; 8088.93,4084.93 cw(c8106,4067.86) 8106,4092 ccw(c8106,4067.86) 8088.93,4084.93 ; 8088.93,4084.93 ccw(c8071.86,4102) 8096,4102 cw(c8071.86,4102) 8088.93,4084.93
  Top Layer w23.62: v4(5280,4160) 5320,4120 U8.6@5386.92,4120 ; 5301.28,3430.28 cw(c5331.99,3399.56) U11.8@5331.99,3443 ; 5311.52,3351.48 ccw(c5331.99,3371.95) U11.6@5331.99,3343 ; U11.8@5363.49,3443 5314,3443 5291,3420 5291,3372 5320,3343 U11.6@5363.49,3343 5711,3343 v4(5735,3319) ; U31.8@8684.38,3720.88 8778.88,3720.88 v5(8794,3736) ; 8748,3720.88 ccw(c8748,3782) v5@8791.22,3738.78
  Top Layer w30: U5.6@4920.49,3343 v3(4984,3343) ; U5.8@4920.49,3443 v3(4984,3443) ; C18.1@4950,2992 5017,2992 v8(5046,3021) C23.2@5046,3215 ; C28.1@5397,2992 5448,2941 v3(5448,2940) ; v3(5795,4601) 5796,4602 U18.1@5875,4602 ; v4(5798,3350) 5829,3381 D8.2@5884,3381 D9.2@5884,3261 ; R61.1@6347,3581.5 v3(6347,3635) R69.1@6347,3687 ; R80.2@6768,4365 6866,4365 6905.8,4325.2 v10(7066,4325.2) ; C57.2@7012.28,4301.01 ccw(c6953.88,4242.61) 6953.88,4325.2 ccw(c6953.88,4407.8) C57.2@7012.28,4349.4 ; C56.2@7020,4762 6957,4762 v3(6951,4768) ; v3(7178,4438) C59.1@7250,4438 ; C58.2@7236,5396 v3(7299,5396) C65.1@7368,5396 ; v3(7764,4237) 7800,4273 D13.2@7882,4273 ; C215.2@7788,3582 7788,3569 7812,3545 v7(7879,3545) ; pad.0@7956.45,4528.79 ccw(c7965.21,4557.7) pad.0@7979.46,4531.06 ; pad.0@7958.5,5122.94 ccw(c7962.35,5174.38) pad.0@8008.91,5152.18 ; pad.0@7959.49,5093.31 ccw(c7938.44,5175.29) pad.0@8020.29,5153.76 ; pad.0@7970.38,4525.68 cw(c7981.35,4503.17) pad.0@7999.4,4520.53 ; pad.0@7976.82,5105.69 cw(c8026.11,5112.39) pad.0@8003.17,5156.53 ; pad.0@7985.01,4566.64 cw(c8001.57,4548.41) pad.0@8002.76,4573.01 ; C75.2@7986,4698 v3(8047,4698) ; C74.2@7986,5262 8050,5262 v3(8051,5261) ; pad.0@7991.78,4558.81 ccw(c7972.21,4575.73) pad.0@7998.01,4577.63 ; pad.0@7999.51,4574.42 cw(c7985.14,4559.69) pad.0@8002.96,4549.4 ; pad.0@8001.36,4582.72 ccw(c7991.99,4609.7) 8017.69,4597.25 ; pad.0@8001.92,5155.88 ccw(c7991.23,5204.24) 8032.99,5177.61 ; pad.0@8007.76,4576.47 cw(c8034.96,4567.76) pad.0@8021.89,4593.15 ; pad.0@8007.87,4525.13 cw(c8068.82,4539.26) pad.0@8016.4,4573.41 ; pad.0@8007.92,5150.09 cw(c8056.03,5141.17) 8028.31,5181.5 ; pad.0@8008,5160 8046,5198 ; pad.0@8013,4590 8049,4626 C80.2@8224,4626 ; X1.2@8063,3837 8065,3835 8128,3835 8157,3806 v7(8157,3738) ; v3(8191,5274) 8224,5241 C78.2@8224,5198 8046,5198 ; 8207.63,5341 ccw(c8207.63,5286.37) v3(8169,5325) 8185,5341 C82.2@8243,5341 C77.2@8243,5438.88 8321.12,5438.88 v3(8333,5427) ccw(c8304.31,5398.31) 8304.31,5438.88 ; C77.2@8231.34,5427.22 cw(c8203.18,5399.06) 8243,5399.06 cw(c8282.82,5399.06) C77.2@8254.66,5427.22 ; C77.2@8276.32,5427.22 cw(c8304.48,5399.06) 8304.48,5438.88 cw(c8304.48,5478.71) C77.2@8276.32,5450.55 ; C83.2@8389,5498 v3(8389,5576) ; v3(8432,2354) C85.2@8504,2354 ; C92.2@8834,2662 pad.2@8900,2662 ; C86.2@8834,3961 pad.0@8903,3961 ; v3(6951,4768) ccw(c6965.49,4782.49) 6965.49,4762 cw(c6965.49,4782.49) v3(6951,4768) ; C57.2@7029.79,4325.2 cw(c7029.79,4288.99) 7055.39,4314.6 ccw(c7029.79,4288.99) C57.2@7029.79,4325.2 ; C57.2@7029.79,4325.2 ccw(c7029.79,4361.42) 7055.39,4335.81 cw(c7029.79,4361.42) C57.2@7029.79,4325.2 ; pad.0@7957,4580 ccw(c7957,4691.05) 8035.53,4612.53 ; pad.0@7957,4580 ccw(c7957,4691.05) 8035.53,4612.53 ; pad.0@7957,4580 ccw(c7957,4691.05) 8035.53,4612.53 ; pad.0@7958.79,4549.92 ccw(c7963.26,4599.83) pad.0@8008.36,4577.99 ; pad.0@7958.79,4549.92 ccw(c7963.26,4599.83) pad.0@8008.36,4577.99 ; pad.0@7958.79,4549.92 ccw(c7963.26,4599.83) pad.0@8008.36,4577.99 ; pad.0@7958.79,4549.92 ccw(c7963.26,4599.83) pad.0@8008.36,4577.99 ; pad.0@7959.27,4520.26 ccw(c7940.51,4600.59) pad.0@8020.19,4579.24 ; pad.0@7959.27,4520.26 ccw(c7940.51,4600.59) pad.0@8020.19,4579.24 ; pad.0@7959.27,4520.26 ccw(c7940.51,4600.59) pad.0@8020.19,4579.24 ; pad.0@7976.85,4532.43 cw(c8027.55,4538.62) pad.0@8004.18,4584.04 ; pad.0@7976.85,4532.43 cw(c8027.55,4538.62) pad.0@8004.18,4584.04 ; pad.0@7976.85,4532.43 cw(c8027.55,4538.62) pad.0@8004.18,4584.04 ; pad.0@7976.85,4532.43 cw(c8027.55,4538.62) pad.0@8004.18,4584.04 ; pad.0@8001.94,4582.89 ccw(c7991.03,4633.23) 8034.35,4605.35 ; pad.0@8001.94,4582.89 ccw(c7991.03,4633.23) 8034.35,4605.35 ; pad.0@8001.94,4582.89 ccw(c7991.03,4633.23) 8034.35,4605.35 ; pad.0@8007,4530 cw(c8137.37,4530) 8045.18,4622.18 ; pad.0@8007,4530 cw(c8137.37,4530) 8045.18,4622.18 ; pad.0@8007,4530 cw(c8137.37,4530) 8045.18,4622.18 ; pad.0@8007.91,4577.06 cw(c8054.34,4568.16) 8027.8,4607.28 ; pad.0@8007.91,4577.06 cw(c8054.34,4568.16) 8027.8,4607.28 ; pad.0@8007.91,4577.06 cw(c8054.34,4568.16) 8027.8,4607.28 ; 8046,5198 ccw(c8140.14,5103.85) 8007,5103.23 cw(c8140.14,5103.85) 8046,5198 ; pad.0@7957,5153 ccw(c7957,5259.23) 8032.11,5184.11 cw(c7957,5259.23) pad.0@7957,5153
  Top Layer w31.5: C20.2@5011,3815 v5(5071,3815) ; v5(5047,3941) 5068,3920 U8.19@5127.08,3920 ; v5(5107,4469) 5158,4469 5202,4425 C22.2@5203,4425 ; C35.2@5687,3393 v4(5752,3393) ; SW2.1@5748,4095 v5(5806,4095) ; SW2.1@5757.74,4085.26 cw(c5781.27,4061.73) 5781.27,4095 cw(c5781.27,4128.27) SW2.1@5757.74,4104.74 ; C43.2@6079,4757 v4(6079,4818) ; D14.2@8101,3192 D15.2@8101,3097 v5(8160,3038) ; C87.2@8684,3297 C90.1@8684,3394 v4(8684,3454) ; U32.8@8684.38,2412.88 v5(8779.88,2412.88) ; v5(8739,3477) C89.2@8739,3537 ; C96.2@9113,4049 C97.1@9113,4137 v4(9183,4137) ; v4(9114,3452) 9114,3448 9115,3449 C99.2@9115,3515
  Top Layer w39.37: SW1.2@5603,4677 v17(5603,4742) ; C46.2@6359,4542 6412,4489 v8(6431,4489) ; v10(7066,4325.2) 7186.8,4325.2 v8(7187,4325) ; C57.2@7116.41,4304.33 cw(c7166.81,4253.92) 7166.81,4325.2 cw(c7166.81,4396.49) C57.2@7116.41,4346.08 ; 6391.84,4509.16 ccw(c6431,4548.31) 6431,4492.94 cw(c6431,4548.31) 6391.84,4509.16
  Top Layer w47.24: J3.4@6599,5531 6626,5558 R77.2@6736.88,5558 ; J3.4@6603.18,5526.82 cw(c6678.44,5451.56) 6678.44,5558 ; v8(6604,5424) 6651,5471 R78.1@6736.88,5471
  Top Layer w50: U26.12@8085.84,4385.28 U26.11@8085.84,4359.68 8085.84,4343.16 8107,4322 C81.2@8232,4322 8232,4238 v9(8231,4237) ; U25.12@8085.84,4955.28 U25.11@8085.84,4929.68 8085.84,4909.16 8103,4892 ; U26.11@8090.37,4359.68 ccw(c8141.2,4359.68) 8105.26,4323.74 ; U25.11@8090.83,4933.83 ccw(c8135,4924) 8103,4892 ; v2(8329,4892) C79.2@8232,4892 8103,4892 ; v2(8337,5118) C84.2@8448,5118 ; v8(8448,5048) C84.2@8448,5118 ; v8(8547,5118) C84.2@8448,5118 ; D6.1@8595,4765.98 8657.78,4703.2 v2(8752.2,4703.2) ; C88.2@8735.08,4817.35 cw(c8693.75,4776.02) 8752.2,4776.02 cw(c8810.66,4776.02) C88.2@8769.33,4817.35 ; C88.2@8735.08,4910.65 ccw(c8693.75,4951.98) 8752.2,4951.98 ccw(c8810.66,4951.98) C88.2@8769.33,4910.65 ; v8(8752,4985) 8752.2,4984.8 C88.2@8752.2,4864 ; C88.2@8769.33,4846.88 cw(c8810.66,4805.55) 8810.66,4864 cw(c8810.66,4922.45) C88.2@8769.33,4881.12 ; v8(8851.41,4864) C88.2@8752.2,4864 ; v8(8868,4765) C91.2@8868,4677 8778.41,4677 v2(8752.2,4703.2) ; C105.2@9657,5048 9680.8,5024.2 v2(9680.8,4864) ; C105.2@9662,5048 cw(c9616.62,5002.62) 9680.8,5002.62 ; C104.2@9663.67,4910.65 ccw(c9622.34,4951.98) 9680.8,4951.98 ccw(c9739.25,4951.98) C104.2@9697.92,4910.65 ; v2(8752.2,4703.2) ccw(c8815.47,4766.47) 8815.47,4677 cw(c8815.47,4766.47) v2(8752.2,4703.2) ; v2(8752.2,4703.2) C88.2@8752.2,4864
  Top Layer w60: C54.2@7066,4920.2 v10(7066,5014)
  Mid-Layer 2 w20: J4.2@4995.9,5520.46 5105.36,5411 6281,5411 v2(6301,5431)
  Bottom Layer w7: C164.1@7207.58,3844.82 ccw(c7203.71,3851.02) 7211.02,3851.02 ; C164.1@7211.02,3839.3 7211.02,3851.02 ; C164.1@7211.6,3839.02 cw(c7220.78,3845.16) 7212.97,3852.97 ; C164.1@7214.46,3844.82 cw(c7218.32,3851.02) 7211.02,3851.02 ; C164.1@7217.42,3842.92 cw(c7228,3850) 7219,3859 ; v1(7290.1,3839.47) 7270.56,3859 7219,3859 ; 7211.02,3851.02 7219,3859 ; 7279.27,3850.29 cw(c7268.44,3839.47) 7283.75,3839.47 ccw(c7268.44,3839.47) 7279.27,3850.29 ; 7279.27,3850.29 ccw(c7290.1,3861.12) 7290.1,3845.81 cw(c7290.1,3861.12) 7279.27,3850.29
  Bottom Layer w10: v1(5972,4350) 5972,4331.72 5976.87,4326.84 D20.21@6013.57,4326.84 ; v1(6032,4478) 6033,4478 6038,4473 6038,4458 6062.79,4433.21 D20.26@6062.79,4415.43 ; v1(6953,2797) 6975.7,2819.7 C158.2@7006.98,2819.7 ; C146.1@6978.3,3488.98 C146.1@6978.98,3488.98 ; C178.1@7149.3,2892.98 7149.3,2862.7 7150,2862 v1(7150,2859) ; v1@7169.01,3763.7 v1(7171.99,3760.73) ; v1@7169.56,3566.3 v1(7171.99,3563.87) ; v1(7248,2835) 7249,2835 7249.3,2834.7 C171.1@7280.98,2834.7 ; v1@7250.73,3480.29 cw(c7250.73,3468.6) 7258.99,3476.87 cw(c7267.26,3485.13) v1@7255.57,3485.13 ; v1(7250.73,3485.13) 7269,3466.86 ; C177.1@7256.78,3441.38 ccw(c7236.34,3466.86) 7269,3466.86 ; C177.1@7259.2,3436.78 7269,3446.57 7269,3466.86 ; C177.1@7263.04,3433.58 ccw(c7253.06,3446.01) 7269,3446.01 ; C187.1@7358.8,3456.22 7379.3,3456.22 v1(7408.21,3485.13) ; C187.1@7363.04,3453.4 cw(c7369.87,3446.57) C187.1@7369.87,3456.22 ; C187.1@7363.04,3460.47 ccw(c7373.28,3470.71) 7373.28,3456.22 ; C180.1@7378.12,3992.15 ccw(c7372.99,4005.58) 7387.36,4005.58 ; C180.1@7379.2,3986.78 7387.36,3994.94 7387.36,4005.58 ; 7397.74,4015.33 cw(c7424.46,4008.17) v1@7410.63,4032.12 ; v1@7403.36,3485.13 cw(c7391.67,3485.13) 7399.94,3476.87 cw(c7408.21,3468.6) v1@7408.21,3480.29 ; v1(7408.21,4036.32) 7408.21,4026.42 ; 7387.36,4005.58 7408.21,4026.42 ; 7408.21,4026.42 cw(c7415.89,4026.42) 7411.18,4032.49 ccw(c7415.89,4026.42) 7408.21,4026.42 ; 7408.21,4026.42 ccw(c7400.52,4026.42) 7405.24,4032.49 cw(c7400.52,4026.42) 7408.21,4026.42 ; 7392.94,4011.16 ccw(c7367.79,4036.32) 7403.36,4036.32 cw(c7367.79,4036.32) 7392.94,4011.16
  Bottom Layer w12: v3(6271,4849) 6298.2,4876.2 U34.40@6355.94,4876.2 ; v3@6271.07,4858 ccw(c6271.24,4879.15) 6286.37,4864.37 ; v3@6271.1,4858 ccw(c6271.35,4878.86) 6285.93,4863.94 ccw(c6300.86,4849.35) v3@6280,4849.1 ; v3@6280,4849.07 cw(c6301.15,4849.24) 6286.37,4864.37 ; C115.1@6499.3,4390.98 6499.3,4439.3 v3(6502,4442) 6503,4442 6521.3,4460.3 U34.26@6521.3,4573.06 ; v7@6517.76,5137.24 ccw(c6509.21,5145.79) 6521.3,5145.79 ; 6521.3,5149.18 ccw(c6538.18,5149.18) v7@6526.24,5137.24 ; v7(6522,5133) 6521.3,5133.7 U34.55@6521.3,5204.94 6521.3,5269.3 6537.3,5285.3 C114.1@6537.3,5345.98 ; v1(6592,5345) C117.1@6633.7,5345.02 ; v7@6644.76,5137.24 ccw(c6633.91,5148.09) 6649.25,5148.09 ; v7(6649,5133) 6649.25,5133.25 U34.60@6649.25,5204.94 ; U34.21@6649.25,4573.06 6649.25,4436.25 v3(6649,4436) 6649,4405 ; 6649.25,5146.88 ccw(c6662.88,5146.88) v7@6653.24,5137.24 ; 6660.78,4393.22 ccw(c6669.66,4402.1) C118.1@6675.27,4390.86 ; C118.1@6669.91,4401.6 cw(c6661.82,4417.82) 6649,4405 ; C118.1@6671.7,4397.02 6656.98,4397.02 6649,4405 ; U34.17@6751.61,4573.06 6751.61,4518.28 6774.84,4495.05 6774.84,4414.16 6787,4402 6846,4402 ; v7@6823.76,5137.24 ccw(c6812.58,5148.42) 6828.39,5148.42 ; v7(6828,5133) 6828.39,5133.39 U34.67@6828.39,5204.94 ; 6828.39,5146.55 ccw(c6841.55,5146.55) v7@6832.24,5137.24 ; C120.1@6845.3,4439.98 6845.3,4402.7 6846,4402 ; v7@6926.76,5137.24 ccw(c6917.12,5146.88) 6930.75,5146.88 ; U34.10@6930.75,4573.06 6930.75,4484.25 v1(6931,4484) ; 6930.75,5148.09 ccw(c6946.09,5148.09) v7@6935.24,5137.24 ; U34.71@6930.75,5204.94 6930.75,5133.25 v7(6931,5133) ; C127.1@6948.3,4439.98 6948.3,4413.3 6937,4402 6846,4402 ; C138.1@6959.3,5345.98 v7(6998,5346) ; 6983.47,5345.98 ccw(c6983.47,5360.53) v7@6993.76,5350.24 ; 6983.56,5345.98 cw(c6983.56,5331.56) v7@6993.76,5341.76 ; v7(7013,4699) 7058.7,4653.3 U34.5@7058.7,4573.06 ; v1(7038,5283) 7058.7,5262.3 U34.76@7058.7,5204.94 ; v7@7121.76,5309.24 ccw(c7110.79,5320.21) 7126.3,5320.21 ; v7(7126,5305) 7126.3,5305.3 C152.1@7126.3,5345.98 ; 7126.3,5318.76 ccw(c7139.76,5318.76) v7@7130.24,5309.24 ; v3(7178,4438) 7178,4444 7178.3,4444.3 C159.1@7178.3,4481.98 ; U34.90@7224.06,4901.8 7286.8,4901.8 v1(7287,4902) ; 6286.36,4864.36 cw(c6271,4879.73) 6271,4858 ccw(c6271,4879.73) 6286.36,4864.36 ; 6286.36,4864.36 ccw(c6301.73,4849) 6280,4849 cw(c6301.73,4849) 6286.36,4864.36 ; 6649,4414.27 cw(c6670.73,4414.27) 6655.36,4429.64 ccw(c6670.73,4414.27) 6649,4414.27 ; 6649,4414.27 ccw(c6627.27,4414.27) 6642.64,4429.64 cw(c6627.27,4414.27) 6649,4414.27 ; 7023.24,4688.76 cw(c7033.49,4699) 7019,4699 ccw(c7033.49,4699) 7023.24,4688.76 ; 7023.24,4688.76 ccw(c7013,4678.51) 7013,4693 cw(c7013,4678.51) 7023.24,4688.76 ; v3@6495.64,4435.64 cw(c6486.79,4426.79) 6499.3,4426.79 ccw(c6486.79,4426.79) v3@6495.64,4435.64 ; 6499.3,4413.76 cw(c6530.24,4413.76) 6508.36,4435.64 ccw(c6530.24,4413.76) 6499.3,4413.76 ; v3@6502,4451 ccw(c6502,4475.14) 6519.07,4458.07 cw(c6502,4475.14) v3@6502,4451 ; v3@6511,4442 cw(c6530.31,4442) 6516.66,4455.66 ccw(c6530.31,4442) v3@6511,4442 ; v3@6642.64,4442.36 ccw(c6626.66,4458.34) 6649.25,4458.34 cw(c6626.66,4458.34) v3@6642.64,4442.36 ; 6649.25,4457.12 ccw(c6670.12,4457.12) 6655.36,4442.36 cw(c6670.12,4457.12) 6649.25,4457.12 ; 6930.75,4493.89 ccw(c6940.89,4493.89) 6933.72,4486.72 cw(c6940.89,4493.89) 6930.75,4493.89 ; v3@7171.64,4444.36 ccw(c7155.55,4460.45) 7178.3,4460.45 cw(c7155.55,4460.45) v3@7171.64,4444.36 ; 7178.3,4459 ccw(c7199,4459) 7184.36,4444.36 cw(c7199,4459) 7178.3,4459
  Bottom Layer w15: v7(5827,3725) C110.1@5826.98,3754.7 ; v1(6033,4524) 6033,4514 6052.3,4494.7 C224.1@6082.02,4494.7 ; D20.11@6141.53,4218.57 6141.53,4187.15 C226.1@6157.7,4170.98 6160.68,4168 6176,4168 6176,4167.26 v1(6174.4,4165.66) ; C113.1@6220.98,4858.7 6230.68,4849 v3(6271,4849) ; C113.1@6223.75,4860.47 ccw(c6251.43,4888.15) 6251.43,4849 ; C225.1@6289.7,4322.98 6316.68,4296 v1(6318,4296) ; v1(6699.54,4075.69) 6728.8,4046.43 C121.1@6728.8,4046.22 ; C126.1@6728.8,3376.22 6728.8,3396.28 v1(6738.91,3406.39) ; C126.1@6728.8,3376.32 cw(c6768.98,3376.32) v1@6740.57,3404.74 ; 6728.8,3392.09 cw(c6740.89,3392.09) v1@6739.23,3404.07 ; 6728.78,3594 ccw(c6769.04,3594) v1@6740.57,3565.53 ; C124.1@6728.78,3632.8 6728.78,3574.01 v1(6738.91,3563.87) ; v1(6738.91,3918.21) 6756.82,3900.3 C123.1@6761.02,3900.3 ; C123.1@6750.29,3906.83 ccw(c6760.02,3916.56) C123.1@6760.02,3902.8 ; C125.1@6788.2,3474.78 6788.64,3474.78 v1(6817.65,3445.76) ; C122.1@6797.98,3858.7 6817.22,3839.47 v1(6817.65,3839.47) ; C119.1@6816.53,5343.22 cw(c6787.92,5314.6) 6828.39,5314.6 ; v1(6817.65,3327.65) C135.1@6837.78,3347.8 ; C119.1@6818.23,5342.48 cw(c6817.96,5332.06) 6828.39,5332.06 ; C119.1@6819.3,5345.98 6828.39,5336.9 U34.67@6828.39,5204.94 ; C134.1@6846.8,3494.17 cw(c6887.36,3494.17) v1@6858.68,3522.85 ; C134.1@6846.8,3495.22 6846.8,3514.28 v1(6857.02,3524.5) ccw(c6876.95,3504.57) C134.1@6849.91,3496.64 ; 6846.8,3510.05 cw(c6859.06,3510.05) v1@6857.35,3522.18 ; C133.1@6846.8,3652.22 6846.8,3711.13 v1(6857.02,3721.36) ; 6846.8,3691.02 cw(c6887.36,3691.02) v1@6858.68,3719.7 ; 6846.8,3706.9 cw(c6859.06,3706.9) v1@6857.35,3719.04 ; C130.1@6856.7,3760.02 6856.7,3721.68 v1(6857.02,3721.36) ; C128.1@6867.22,4046.2 6886.51,4046.2 v1(6896.39,4036.32) ccw(c6876.94,4016.86) C128.1@6868.68,4043.11 ; C136.1@6868.62,3241.88 ccw(c6876.6,3268.7) v1(6896.39,3248.91) 6886.26,3238.78 C136.1@6867.2,3238.78 ccw(c6867.2,3276.81) v1@6894.7,3250.53 ; 6885.66,4040.01 ccw(c6892.45,4051.54) v1@6895.81,4038.58 ; C129.1@6886.78,3868.8 6886.78,3849.08 v1(6896.39,3839.47) 6936,3839.47 ; 6892.79,3850.23 cw(c6881.2,3843.54) v1@6894.13,3840.07 ; C132.1@6895.36,3721.36 v1(6857.02,3721.36) ; C144.1@6936.02,3645.3 6966.3,3645.3 6976.3,3655.3 C143.1@6976.3,3681.98 6976.3,3683.15 v1(7014.5,3721.36) ; C131.1@6937.3,3799.98 6937.3,3838.17 6936,3839.47 ; C127.1@6948.3,4439.98 v3(7013,4440) ; C145.1@6965.8,3574.22 6985.48,3574.22 v1(7014.5,3603.24) ; C145.1@6966.51,3577.43 ccw(c6966.51,3630.99) 7004.38,3593.12 ; C142.1@6976.02,3802.3 6976.02,3820.98 6957.53,3839.47 6936,3839.47 ; v1@6976.81,3365.39 cw(c7004.8,3338.22) C147.1@7004.8,3377.22 6985.33,3377.22 v1(6975.13,3367.02) cw(c6995.19,3346.97) C147.1@7003.37,3374.12 ; C146.1@6978.98,3488.98 v1(7014.5,3524.5) ; C139.1@7004.8,3967.22 7024.2,3986.63 C140.1@7024.2,3986.78 7024.2,4006.64 v1(7053.87,4036.32) ; C141.1@7013.98,3798.7 7015.9,3798.7 v1(7053.87,3760.73) ; C156.1@7017.98,3445.7 7056.38,3445.7 C155.1@7056.7,3446.02 7056.7,3409.22 v1(7053.87,3406.39) ; C140.1@7027.41,3987.48 cw(c7081.41,3987.48) 7043.22,4025.67 ; C148.1@7035.2,3266.78 7053.06,3248.91 v1(7053.87,3248.91) ; v1@7052.22,3408.05 ccw(c7041.4,3418.87) 7056.7,3418.87 ; v1@7052.22,3680.33 cw(c7042.36,3670.47) 7056.3,3670.47 ; v1(7053.87,3681.99) 7056.3,3679.56 C154.1@7056.3,3641.98 ; v1(7093.24,3524.5) 7131.52,3524.5 C167.1@7131.8,3524.22 ; C162.1@7131.02,3881.3 7131.02,3907.02 7142.21,3918.21 ; C160.1@7131.02,3994.7 7131.02,3929.39 7142.21,3918.21 ; C170.1@7132.02,3291.3 7132.02,3355.06 7143.98,3367.02 ; C169.1@7131.98,3403.7 7131.98,3379.02 7143.98,3367.02 ; C166.1@7132.98,3560.7 7168.81,3560.7 v1(7171.99,3563.87) ; C163.2@7133.02,3763.7 v1@7169.01,3763.7 ; C153.1@7135.3,3641.98 7135.3,3669.3 7147.99,3681.99 v1(7171.99,3681.99) 7172.7,3681.27 C165.1@7172.7,3641.98 ; 7158.67,3560.7 ccw(c7158.67,3577.19) v1@7170.33,3565.53 ; 7159.15,3763.7 cw(c7159.15,3747.89) v1@7170.33,3759.07 ; v1@7172.54,3920.48 ccw(c7175.67,3933.49) 7182.65,3922.08 ; v1@7173.66,3368.66 ccw(c7201.77,3396.05) C168.1@7201.78,3356.8 ; C161.1@7199.38,3925.12 ccw(c7191.48,3898.72) v1(7171.99,3918.21) ; C168.1@7201.78,3356.8 7182.21,3356.8 v1(7171.99,3367.02) 7143.98,3367.02 ; v1(7250.73,3563.87) 7252.15,3565.3 C174.1@7289.98,3565.3 ; v1(7250.73,3681.99) 7288.7,3681.99 C173.1@7289.98,3680.7 C175.1@7289.98,3644.3 ; v1(7287,4902) 7325,4902 7341.3,4918.3 C179.1@7384.02,4918.3 ; v1@7292.36,3838.86 ccw(c7305.28,3835.4) 7293.7,3828.71 ; C172.1@7297.12,3811.63 ccw(c7270.29,3819.66) v1(7290.1,3839.47) 7300.22,3829.34 C172.1@7300.22,3810.2 7320.22,3810.2 C183.1@7350.22,3780.2 ; C172.1@7300.93,3806.99 cw(c7300.93,3752.67) 7339.34,3791.08 ; C172.1@7300.93,3821.99 cw(c7300.93,3803.89) 7313.74,3816.69 ; v1(7329.47,3367.02) 7338.67,3376.22 C189.1@7360.8,3376.22 ; v1@7330.07,3915.94 cw(c7333.54,3903.02) 7340.23,3914.61 ; v1@7331.12,3365.37 cw(c7357.34,3339.15) C189.1@7357.34,3376.22 ; C176.1@7338.2,3436.78 7339.35,3436.78 C187.1@7358.8,3456.22 ; C182.1@7356.12,3912.82 cw(c7346.85,3935.59) v1(7329.47,3918.21) 7337.87,3909.8 C182.1@7357.78,3909.8 ; C190.1@7371.3,3214.02 7406.2,3248.91 v1(7408.21,3248.91) ; C186.1@7371.3,3563.98 7371.3,3541.27 C188.1@7397.78,3514.8 ; C185.1@7371.3,3640.98 7390.98,3640.98 7408.21,3658.21 ; C181.1@7379.2,3830.78 7399.52,3830.78 v1(7408.21,3839.47) ; 7397.45,3835.87 cw(c7404.14,3824.28) v1@7407.6,3837.2 ; C188.1@7400.89,3513.4 ccw(c7428.56,3505.49) v1(7408.21,3485.13) 7397.78,3495.56 C188.1@7397.78,3514.8 ; v1@7408.21,3682.61 cw(c7445.95,3682.61) C184.1@7419.26,3709.3 ; v1@7408.76,4038.59 ccw(c7411.91,4051.6) 7418.88,4040.18 ; v1@7409.82,3486.83 cw(c7436.27,3514.8) C188.1@7397.78,3514.8 ; C184.1@7418.2,3711.78 7408.21,3701.78 v1(7408.21,3681.99) 7408.21,3658.21 ; C191.1@7435.37,4043.13 ccw(c7427.47,4017.05) v1(7408.21,4036.32) 7418.11,4046.22 C191.1@7436.8,4046.22 ; C195.1@7439.9,3395.45 ccw(c7468.47,3387.91) v1(7447.58,3367.02) 7436.78,3377.82 C195.1@7436.78,3396.8 ccw(c7474.73,3396.8) v1@7449.15,3368.75 ; C193.1@7483.7,3640.98 7425.43,3640.98 7408.21,3658.21 ; C197.1@7486.98,3171.7 7545.7,3171.7 7566,3192 v1(7566,3209) ; C196.1@7513.02,3388.3 7513.02,3393.09 v1(7526.32,3406.39) ; C196.1@7516.52,3388.3 cw(c7536.54,3388.3) v1@7522.38,3402.46 ; v1@7524.66,3562.22 cw(c7496.74,3534.3) C194.1@7536.22,3534.3 ; v1@7524.68,3762.4 ccw(c7497.93,3789.77) C192.1@7536.2,3789.78 ; v1@7526,3561.55 cw(c7524.43,3549.86) 7536.22,3549.86 ; v1(7526.32,3918.21) 7545.78,3937.67 C204.1@7545.78,3937.8 ; C192.1@7533.11,3788.32 cw(c7506.91,3780.14) v1(7526.32,3760.73) 7536.2,3770.61 C192.1@7536.2,3789.78 ; C194.1@7533.14,3535.67 ccw(c7506.63,3544.19) v1(7526.32,3563.87) 7536.22,3553.97 C194.1@7536.22,3534.2 ; 7543.69,3546.5 cw(c7532.93,3535.74) C194.1@7547.42,3531.09 ; 7549.98,3175.98 ccw(c7516.96,3209) v1@7563.66,3209 ; C207.1@7837.3,3544.98 v7(7879,3545) ; R153.1@8136,4471 8162,4471 8186,4447 8186,4325 8185,4324 8186,4324 v1(8187,4325) ; R154.1@8145.84,5043.28 8220.28,5043.28 8295,5118 v2(8337,5118) ; v8(8547,5118) 8550,5121 R141.1@8774,5121 ; v1(8599,5291) 8598,5291 8596,5289 R142.1@8679,5289 8765,5289 C219.1@8771,5295 ; 6252.89,4849 cw(c6252.89,4830.89) 6265.7,4843.7 ccw(c6252.89,4830.89) 6252.89,4849 ; 6252.89,4849 ccw(c6252.89,4867.11) 6265.7,4854.3 cw(c6252.89,4867.11) 6252.89,4849 ; 7142.21,3918.21 v1(7171.99,3918.21) ; v1(7171.99,3918.21) 7182,3928.22 C161.1@7200.8,3928.22 ; C161.1@7200.8,3928.22 ccw(c7200.8,3890.81) 7173.68,3916.59 cw(c7200.8,3890.81) C161.1@7200.8,3928.22 ; C191.1@7436.8,4046.22 ccw(c7436.8,4009.08) 7409.9,4034.7 cw(c7436.8,4009.08) C191.1@7436.8,4046.22 ; C128.1@6867.22,4046.2 cw(c6867.23,4007.65) 6894.72,4034.67 ccw(c6867.23,4007.65) C128.1@6867.22,4046.2 ; C129.1@6886.78,3868.34 ccw(c6925.26,3868.34) 6898.05,3841.12 cw(c6925.26,3868.34) C129.1@6886.78,3868.34 ; 6994.85,4439.98 ccw(c6994.85,4458.15) 7007.7,4445.3 cw(c6994.85,4458.15) 6994.85,4439.98 ; 6994.93,4439.98 cw(c6994.93,4421.93) 7007.7,4434.7 ccw(c6994.93,4421.93) 6994.93,4439.98 ; v1@7288.44,3837.81 cw(c7259.99,3809.36) 7300.22,3809.36 ccw(c7259.99,3809.36) v1@7288.44,3837.81 ; v1@7289.77,3837.15 cw(c7288.11,3825.14) 7300.22,3825.14 ccw(c7288.11,3825.14) v1@7289.77,3837.15 ; v1@7331.12,3919.86 ccw(c7355.42,3944.16) 7355.42,3909.8 cw(c7355.42,3944.16) v1@7331.12,3919.86 ; C181.1@7381.57,3830.78 ccw(c7381.57,3866.1) 7406.55,3841.12 cw(c7381.57,3866.1) C181.1@7381.57,3830.78
  Bottom Layer w20: v3@7178,4444 7396,4444 7426,4474 C228.2@7426,4588 ; C209.1@7938.98,2406.7 7938.98,2376.02 v1(7940,2375) ; v7(8740,4594) C210.1@8785.7,4594.02 ; v7(8784.7,3186.3) C211.1@8784.7,3232.02